# EAGLE board sanguish long no fil2 (EAGLE 6.2)
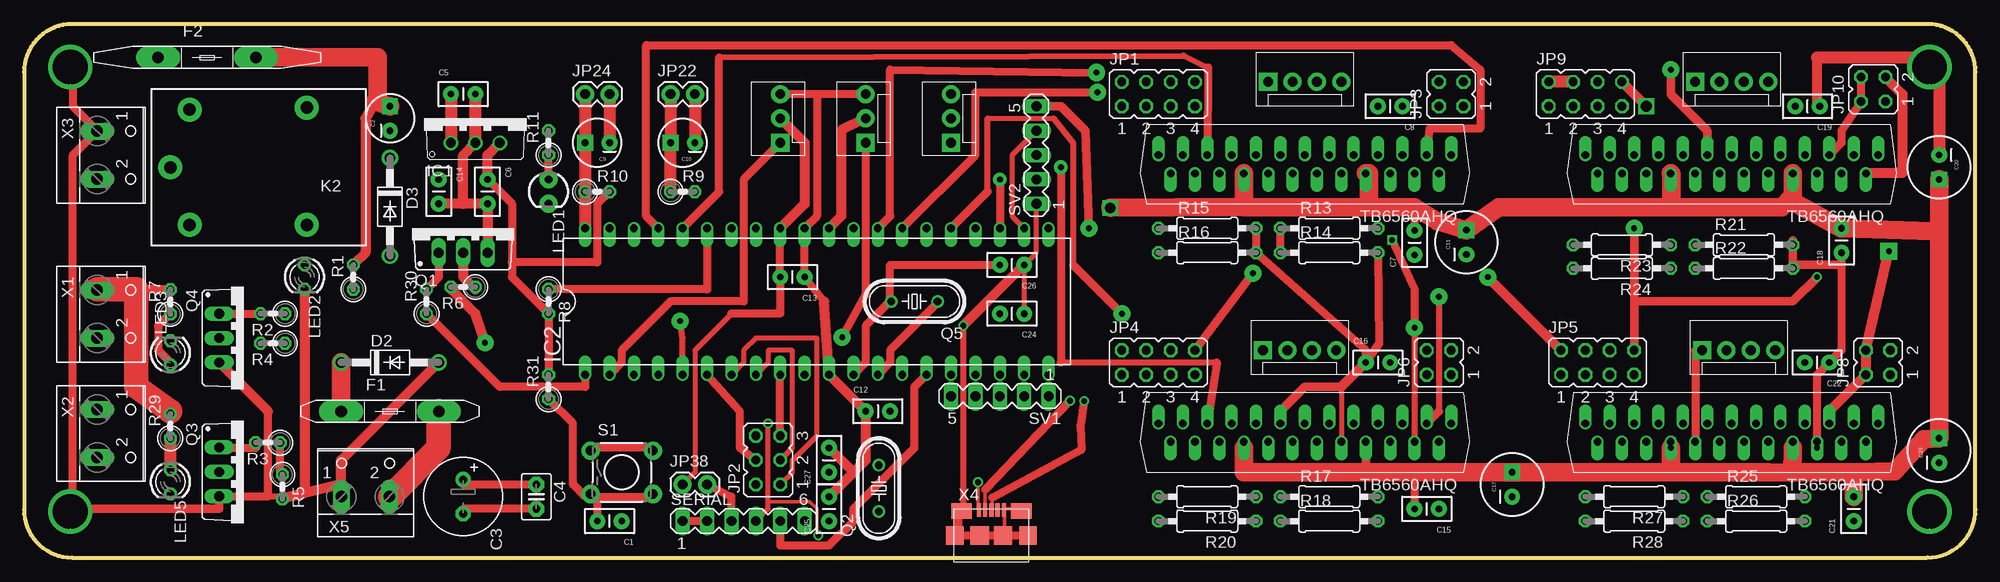
[diagram p0: board, top side]
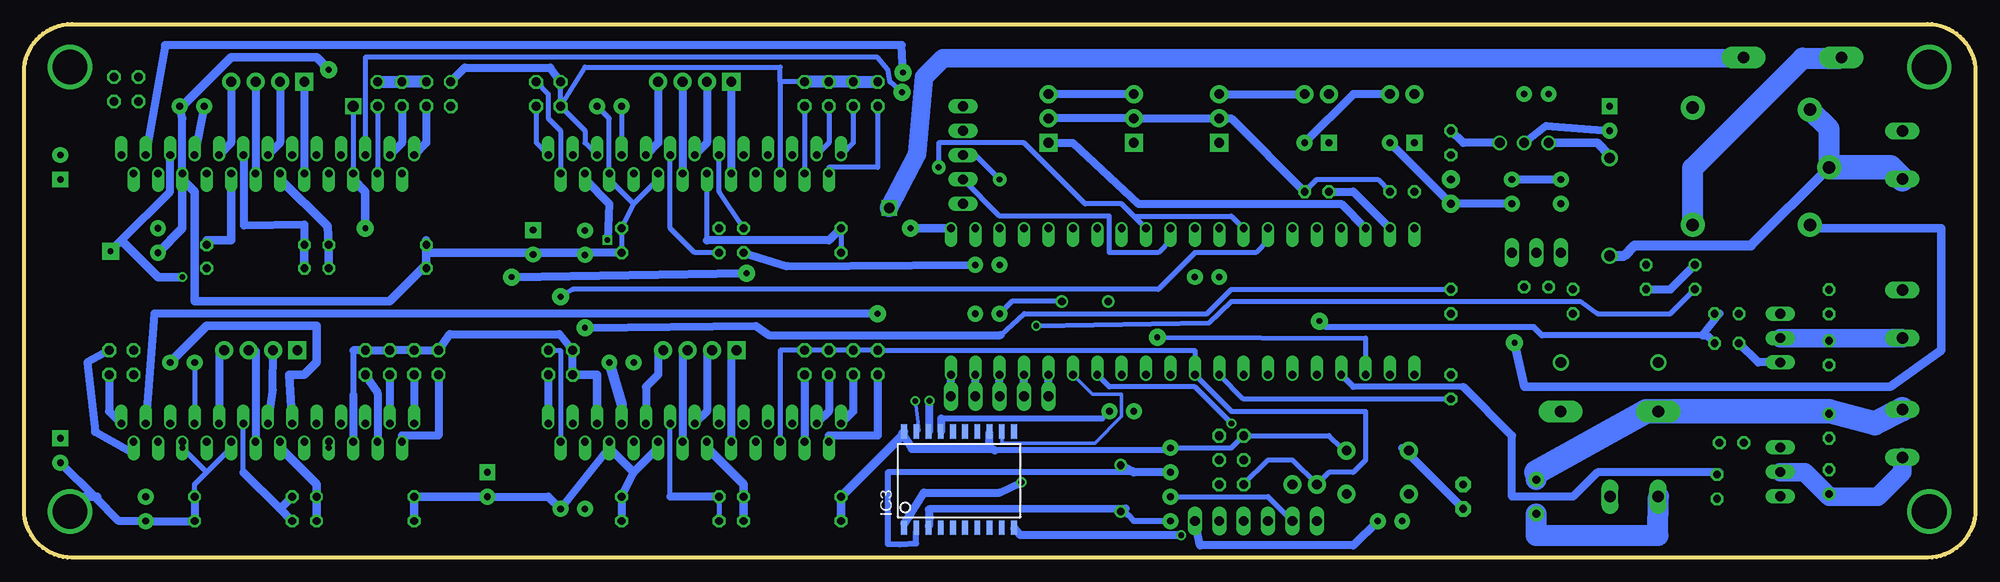
[diagram p1: board, bottom side, seen from below]

Size 203.18 x 55.55 mm. Coordinates in mm from the lower left corner, seen from the top.
Outline: 0,50.55 0,5 arc90 5,0 198.18,0 arc90 203.18,5 203.18,50.55 arc90 198.18,55.55 5,55.55 arc90 0,50.55
Copper layers (1*16): Top 0.035mm / dielectric 1.5mm / Bottom 0.035mm
Design rules: minimum track width 35mil, minimum drill 24mil, track to track 8mil, track to pad 8mil, pad to pad 8mil, via to via 8mil, smd to smd 8mil, copper to edge 40mil, drill to drill 8mil, minimum pad ring 10mil, minimum via ring 8mil, stop-mask expansion 4mil, vias tented up to drill 0mil, thermal gap 10mil
Net classes: 0 default: width 0.178 mm, drill 0.406 mm, clearance 0.178 mm; 1 Power: width 0.3 mm, drill 0.406 mm, clearance 0.178 mm

## Footprints (pad centres in the part's own frame; a part is rotated, then mirrored left to right if it is on the bottom)
CAP-PTH-SMALL2 = drill 0.7 pad 1.651: 1 0,0; 2 2.54,0
CPOL-RADIAL-10UF-25V = drill 0.7 pad 1.651 square: 1 1.27,0 | drill 0.7 pad 1.651: 2 -1.27,0
E3,5-8 = drill 0.813 pad 1.6: + -1.778,0 | drill 0.813 pad 1.6 octagon: - 1.778,0
C2.5-3 = drill 0.813 pad 1.6 octagon: 1 -1.27,0; 2 1.27,0
CPOL-RADIAL-100UF-25V = drill 0.7 pad 1.651 square: 1 1.27,0 | drill 0.7 pad 1.651: 2 -1.27,0
DO41-10 = drill 1.118: A 5.08,0; C -5.08,0
MFR500 = drill 1.2 pad 2.3 long: 1 -5.08,0; 2 5.08,0
MFR1100 = drill 1.2 pad 2.3 long: 1 -5.08,0; 2 5.08,0
78XXL-CUSTOM = drill 1.016: GND 0,0; IN -2.54,0; OUT 2.54,0
DIL40 = drill 0.813 offset: 1 -24.13,-7.62; 2 -21.59,-7.62; 3 -19.05,-7.62; 4 -16.51,-7.62; 5 -13.97,-7.62; 6 -11.43,-7.62; 7 -8.89,-7.62; 8 -6.35,-7.62; 9 -3.81,-7.62; 10 -1.27,-7.62; 11 1.27,-7.62; 12 3.81,-7.62; 13 6.35,-7.62; 14 8.89,-7.62; 15 11.43,-7.62; 16 13.97,-7.62; 17 16.51,-7.62; 18 19.05,-7.62; 19 21.59,-7.62; 20 24.13,-7.62; 21 24.13,7.62; 22 21.59,7.62; 23 19.05,7.62; 24 16.51,7.62; 25 13.97,7.62; 26 11.43,7.62; 27 8.89,7.62; 28 6.35,7.62; 29 3.81,7.62; 30 1.27,7.62; 31 -1.27,7.62; 32 -3.81,7.62; 33 -6.35,7.62; 34 -8.89,7.62; 35 -11.43,7.62; 36 -13.97,7.62; 37 -16.51,7.62; 38 -19.05,7.62; 39 -21.59,7.62; 40 -24.13,7.62
SOIC20 = smd 0.6 x 1.5: 1 -5.715,-5; 2 -4.445,-5; 3 -3.175,-5; 4 -1.905,-5; 5 -0.635,-5; 6 0.635,-5; 7 1.905,-5; 8 3.175,-5; 9 4.445,-5; 10 5.715,-5; 11 5.715,5; 12 4.445,5; 13 3.175,5; 14 1.905,5; 15 0.635,5; 16 -0.635,5; 17 -1.905,5; 18 -3.175,5; 19 -4.445,5; 20 -5.715,5
JP4Q = drill 0.914 octagon: 1 -3.81,-1.27; 2 -3.81,1.27; 3 -1.27,-1.27; 4 -1.27,1.27; 5 1.27,-1.27; 6 1.27,1.27; 7 3.81,-1.27; 8 3.81,1.27
JP3Q = drill 0.914 octagon: 1 -2.54,-1.27; 2 -2.54,1.27; 3 0,-1.27; 4 0,1.27; 5 2.54,-1.27; 6 2.54,1.27
JP2Q = drill 0.914 octagon: 1 -1.27,-1.27; 2 -1.27,1.27; 3 1.27,-1.27; 4 1.27,1.27
MOLEX-1X4 = drill 1.016 pad 1.88 square: 1 0,0 | drill 1.016 pad 1.88: 2 2.54,0; 3 5.08,0; 4 7.62,0
1X02 = drill 1.016 pad 1.88: 1 0,0; 2 2.54,0
MOLEX-1X3 = drill 1.016 pad 1.88 square: 1 0,0 | drill 1.016 pad 1.88: 2 2.54,0; 3 5.08,0
ZN5 = drill 1.3 pad 2.5: 11 8.89,0; 12 -5.31,-6.2; 14 -5.31,6; A1 6.89,6; A2 6.89,-6
LED3MM = drill 0.813 pad 1.88: A -1.27,0; K 1.27,0
LED3MM' = drill 0.813 octagon: A -1.27,0; K 1.27,0
TO220BV = drill 1.016 long: D 0,-2.54; G -2.54,-2.54; S 2.54,-2.54
HC49/S = drill 0.813: 1 -2.413,0; 2 2.413,0
0207/2V = drill 0.813 octagon: 1 -1.27,0; 2 1.27,0
0207/10 = drill 0.813 octagon: 1 -5.08,0; 2 5.08,0
TACTILE-PTH = drill 1.016 pad 1.88: 1 -3.251,2.261; 2 3.251,2.261; 3 -3.251,-2.261; 4 3.251,-2.261
MA06-1 = drill 1.016 long: 1 -6.35,0; 2 -3.81,0; 3 -1.27,0; 4 1.27,0; 5 3.81,0; 6 6.35,0
MA05-1 = drill 1.016 long: 1 -5.08,0; 2 -2.54,0; 3 0,0; 4 2.54,0; 5 5.08,0
PLATEDSCREW = drill 3.6: GND 0,0
ZIP25 = drill 0.8 pad 1.27 offset: 1 -15.24,0; 2 -13.97,1.905; 3 -12.7,0; 4 -11.43,1.905; 5 -10.16,0; 6 -8.89,1.905; 7 -7.62,0; 8 -6.35,1.905; 9 -5.08,0; 10 -3.81,1.905; 11 -2.54,0; 12 -1.27,1.905; 13 0,0; 14 1.27,1.905; 15 2.54,0; 16 3.81,1.905; 17 5.08,0; 18 6.35,1.905; 19 7.62,0; 20 8.89,1.905; 21 10.16,0; 22 11.43,1.905; 23 12.7,0; 24 13.97,1.905; 25 15.24,0
W237-102 = drill 1.194 long: 1 -2.5,-1.27; 2 2.5,-1.27
10118192-0001LF = smd 0.4 x 1.4: 1 -1.3,2.675; 2 -0.65,2.675; 3 0,2.675; 4 0.65,2.675; 5 1.3,2.675 | smd 1.8 x 1.9: M1 3.8,0; M2 -3.8,0 | smd 2.1 x 1.6: M3 -3.1,2.55; M4 3.1,2.55 | smd 1.9 x 1.9: M5 1.2,0; M6 -1.2,0

## Placement (x,y rotation side)
C1  0.1uF  [CAP-PTH-SMALL2]  62.23,3.81 180 top
C2  100uF  [CPOL-RADIAL-10UF-25V]  38.1,45.72 90 top
C3  470uF  [E3,5-8]  45.72,6.35 270 top
C4  100nF  [C2.5-3]  53.34,6.35 270 top
C5  0.33uF  [CAP-PTH-SMALL2]  44.45,48.26 0 top
C6  0.1uF  [CAP-PTH-SMALL2]  48.26,39.37 270 top
C7  0.1uF  [CAP-PTH-SMALL2]  144.78,31.52 90 top
C8  0.1uF  [CAP-PTH-SMALL2]  143.51,46.99 180 top
C9  10uF  [CPOL-RADIAL-10UF-25V]  59.69,43.18 180 top
C10  10uF  [CPOL-RADIAL-10UF-25V]  68.58,43.18 180 top
C11  10uf  [CPOL-RADIAL-100UF-25V]  150.17,32.83 90 top
C12  0.1uF  [CAP-PTH-SMALL2]  87.63,15.24 0 top
C13  0.1uF  [CAP-PTH-SMALL2]  81.28,29.21 180 top
C14  0.1uF  [CAP-PTH-SMALL2]  43.18,39.37 270 top
C15  0.1uF  [CAP-PTH-SMALL2]  147.32,5.08 180 top
C16  0.1uF  [CAP-PTH-SMALL2]  139.7,20.32 0 top
C17  10uf  [CPOL-RADIAL-100UF-25V]  154.94,7.62 90 top
C18  0.1uF  [CAP-PTH-SMALL2]  189.23,31.75 90 top
C19  0.1uF  [CAP-PTH-SMALL2]  186.96,46.99 180 top
C20  10uf  [CPOL-RADIAL-100UF-25V]  199.39,40.64 270 top
C21  0.1uF  [CAP-PTH-SMALL2]  190.5,3.81 90 top
C22  0.1uF  [CAP-PTH-SMALL2]  187.96,20.32 180 top
C23  10uf  [CPOL-RADIAL-100UF-25V]  199.39,11.16 90 top
C24  22pf  [CAP-PTH-SMALL2]  104.14,25.4 180 top
C25  22pf  [CAP-PTH-SMALL2]  83.82,3.81 90 top
C26  22pf  [CAP-PTH-SMALL2]  104.14,30.48 180 top
C27  22pf  [CAP-PTH-SMALL2]  83.82,8.89 90 top
D2  1N4004  [DO41-10]  38.1,20.32 0 top
D3  1N4004  [DO41-10]  38.1,36.52 270 top
F1  MFR500  [MFR500]  38.1,15.24 0 top
F2  MFR1100  [MFR1100]  19.05,52.07 0 top
IC1  LM7805  [78XXL-CUSTOM]  46.99,43.18 0 top
IC2  ATMEGA644-20PU  [DIL40]  82.55,26.67 0 top
IC3  MCP2200SOIC20  [SOIC20]  105.83,8.12 0 bottom
JP1  [JP4Q]  118.11,48.26 0 top
JP2  [JP3Q]  77.47,10.16 90 top
JP3  [JP2Q]  148.59,48.26 90 top
JP4  [JP4Q]  118.11,20.32 0 top
JP5  [JP4Q]  163.83,20.32 0 top
JP6  [JP2Q]  147.32,20.32 90 top
JP7  MOT-E  [MOLEX-1X4]  129.54,49.53 0 top
JP8  [JP2Q]  193.04,20.32 90 top
JP9  [JP4Q]  162.56,48.26 0 top
JP10  [JP2Q]  192.54,48.76 90 top
JP22  E-THERM  [1X02]  67.31,48.26 0 top
JP24  B-THERM  [1X02]  58.42,48.26 0 top
JP25  MOT-E  [MOLEX-1X4]  129,21.59 0 top
JP26  MOT-E  [MOLEX-1X4]  173.99,49.53 0 top
JP27  X-STOP  [MOLEX-1X3]  87.63,43.18 90 top
JP28  Y-STOP  [MOLEX-1X3]  96.52,43.18 90 top
JP29  Z-STOP  [MOLEX-1X3]  78.74,43.18 90 top
JP31  MOT-E  [MOLEX-1X4]  174.72,21.59 0 top
JP38  X-MS2  [1X02]  68.58,7.62 0 top
K2  ZNS5124  [ZN5]  24.13,40.64 180 top
LED1  POWER  [LED3MM]  54.61,38.1 270 top
LED2  [LED3MM']  29.21,29.21 270 top
LED3  [LED3MM']  15.24,21.32 90 top
LED5  [LED3MM']  15.24,7.89 270 top
Q1  STP55NF06L  [TO220BV]  45.72,34.29 0 top
Q2  [HC49/S]  89,7.22 90 top
Q3  STP55NF06L  [TO220BV]  22.86,8.93 270 top
Q4  STP55NF06L  [TO220BV]  22.86,22.86 270 top
Q5  [HC49/S]  92.71,26.67 180 top
R1  1k  [0207/2V]  34.29,29.21 90 top
R2  10r  [0207/2V]  25.9,25.4 180 top
R3  10r  [0207/2V]  25.4,11.97 180 top
R4  100k  [0207/2V]  25.9,22.32 180 top
R5  100k  [0207/2V]  26.9,7.39 270 top
R6  560r  [0207/2V]  45.72,28.17 180 top
R7  1.8k  [0207/2V]  15.24,26.63 90 top
R8  100k  [0207/2V]  54.61,26.67 270 top
R9  4.7k  [0207/2V]  68.58,38.1 0 top
R10  4.7k  [0207/2V]  59.69,38.1 0 top
R11  1k  [0207/2V]  54.61,43.18 90 top
R13  0.5 ohm  [0207/10]  135.89,34.29 0 top
R14  0.5 ohm  [0207/10]  135.89,31.75 0 top
R15  0.5 ohm  [0207/10]  123.19,34.29 0 top
R16  0.5 ohm  [0207/10]  123.19,31.75 0 top
R17  0.5 ohm  [0207/10]  135.89,6.35 0 top
R18  0.5 ohm  [0207/10]  135.89,3.81 0 top
R19  0.5 ohm  [0207/10]  123.19,6.35 180 top
R20  0.5 ohm  [0207/10]  123.19,3.81 180 top
R21  0.5 ohm  [0207/10]  179.07,32.56 0 top
R22  0.5 ohm  [0207/10]  179.07,30.12 0 top
R23  0.5 ohm  [0207/10]  166.37,32.56 180 top
R24  0.5 ohm  [0207/10]  166.37,30.12 180 top
R25  0.5 ohm  [0207/10]  180.34,6.35 0 top
R26  0.5 ohm  [0207/10]  180.34,3.81 0 top
R27  0.5 ohm  [0207/10]  167.64,6.35 180 top
R28  0.5 ohm  [0207/10]  167.64,3.81 180 top
R29  1.8k  [0207/2V]  15.24,13.7 90 top
R30  560r  [0207/2V]  41.91,26.67 90 top
R31  100k  [0207/2V]  54.61,17.78 90 top
S1  RESET  [TACTILE-PTH]  62.23,8.89 0 top
SERIAL  [MA06-1]  74.93,3.81 0 top
SV1  [MA05-1]  101.6,16.81 180 top
SV2  [MA05-1]  105.41,41.91 90 top
U$7  PLATED-SCREW  [PLATEDSCREW]  198.39,4.81 0 top
U$17  PLATED-SCREW  [PLATEDSCREW]  4.81,51.07 0 top
U$21  TB6560  [ZIP25]  133.35,13.97 180 top
U$37  PLATED-SCREW  [PLATEDSCREW]  4.81,4.81 0 top
U$38  PLATED-SCREW  [PLATEDSCREW]  198.39,51.07 0 top
U$43  TB6560  [ZIP25]  177.8,41.91 180 top
U$46  TB6560  [ZIP25]  177.8,13.97 180 top
X1  [W237-102]  8.89,25.36 270 top
X2  [W237-102]  8.89,12.93 270 top
X3  [W237-102]  8.89,41.91 270 top
X4  MICRO-USB-SHIELD-  [10118192-0001LF]  100.72,2.31 0 top
X5  [W237-102]  35.56,7.62 0 top
XMOT  TB6560  [ZIP25]  133.35,41.91 180 top

## Library data of the parts
C1 C2 C5-C27 IC1 JP7 JP22 JP24-JP29 JP31 JP38 LED1 S1 = SparkFun
C3 = adafruit
C4 = capacitor-wima
D2 D3 = diode
F1 F2 = RepRapjr
IC2 = atmel; MPN: ATMEGA644-20PU; OC_FARNELL: 1288340; OC_NEWARK: 23M5060
IC3 = microchip-update-2
JP1-JP6 JP8-JP10 = jumper
K2 = relay; OC_FARNELL: unknown; OC_NEWARK: unknown
LED2 LED3 LED5 = led
Q1 Q3 Q4 = transistor-power
Q2 Q5 = crystal; OC_FARNELL: 1667008; OC_NEWARK: unknown
R1-R11 R13-R31 = resistor
SERIAL SV1 SV2 = con-lstb; OC_FARNELL: unknown; OC_NEWARK: unknown
U$7 U$17 U$37 U$38 = Sanguinololu
U$21 U$43 U$46 XMOT = tb6560
X1-X3 X5 = con-wago-500; MPN: 237-102; OC_FARNELL: unknown; OC_NEWARK: 70K9898
X4 = shinythings

## Nets
5V: C6.1 C13.2 C14.1 IC1.OUT IC2.10 IC2.30 IC2.32 JP1.2 JP1.4 JP1.6 JP1.8 JP2.2 JP3.2 JP3.4 JP4.2 JP4.4 JP4.6 JP4.8 JP5.2 JP5.4 JP5.6 JP5.8 JP6.2 JP6.4 JP8.2 JP8.4 JP9.2 JP9.4 JP9.6 JP9.8 JP10.2 JP10.4 JP27.2 JP28.2 JP29.2 JP38.1 R8.2 R9.2 R10.2 R11.2 R31.2 SV2.2 U$21.5 U$21.20 U$43.5 U$43.20 U$46.5 U$46.20 XMOT.5 XMOT.20
!HOTBED: IC2.5 R2.1 R4.1
!HOTEND: IC2.4 R3.1 R5.1
!RESET: C1.2 IC2.9 JP2.5 R31.1 S1.3 S1.4
!STEP-ENABLE-E: U$46.4
!STEP-ENABLE-XY: IC2.35 R8.1 U$21.4 XMOT.4
+12V: C3.+ C4.1 D2.C F1.1 R7.2 R29.2 X1.1 X2.1
B-THERM: C9.1 IC2.40 JP24.1 R10.1
E-DIR: U$46.21
E-STEP: IC2.25 U$46.3
E-THERM: C10.1 IC2.39 JP22.1 R9.1
GND [Power]: C2.2 C3.- C4.2 C5.2 C6.2 C7.1 C8.1 C9.2 C10.2 C11.2 C12.1 C13.1 C14.2 C15.1 C16.1 C17.2 C18.1 C19.1 C20.2 C21.1 C22.1 C23.2 C24.1 C25.2 C26.1 C27.2 D2.A IC1.GND IC2.11 IC2.31 IC3.13 IC3.20 JP2.6 JP22.2 JP24.2 JP27.3 JP28.3 JP29.3 LED1.K LED2.K Q1.S Q3.S Q4.S R4.2 R5.2 R13.2 R14.2 R15.2 R16.2 R17.2 R18.2 R19.2 R20.2 R21.2 R22.2 R23.2 R24.2 R25.2 R26.2 R27.2 R28.2 S1.1 S1.2 SERIAL.1 SERIAL.2 SV2.1 U$7.GND U$17.GND U$21.6 U$21.10 U$21.15 U$37.GND U$38.GND U$43.6 U$43.10 U$43.15 U$46.6 U$46.10 U$46.15 X3.1 X4.5 X4.M1 X4.M2 X4.M3 X4.M4 X4.M5 X4.M6 X5.1 XMOT.6 XMOT.10 XMOT.15
LED1: LED1.A R11.1
N$1: JP7.1 XMOT.16
N$2: JP25.1 U$21.16
N$3: JP7.2 XMOT.13
N$4: JP7.3 XMOT.12
N$5: JP7.4 XMOT.9
N$6: JP5.7 U$46.22
N$7: JP1.7 XMOT.22
N$8: JP1.3 XMOT.25
N$9: JP1.1 XMOT.24
N$10: JP10.3 U$43.2
N$11: JP3.1 XMOT.1
N$12: JP5.5 U$46.23
N$13: JP25.2 U$21.13
N$14: JP25.3 U$21.12
N$15: R13.1 R14.1 XMOT.11
N$16: R15.1 R16.1 XMOT.14
N$17: JP25.4 U$21.9
N$18: JP9.7 U$43.22
N$19: C8.2 XMOT.7
N$20: JP4.7 U$21.22
N$21: JP4.3 U$21.25
N$22: JP4.1 U$21.24
N$23: JP9.5 U$43.23
N$24: JP8.3 U$46.2
N$25: JP5.3 U$46.25
N$26: R17.1 R18.1 U$21.11
N$27: R19.1 R20.1 U$21.14
N$28: C16.2 U$21.7
N$29: JP26.1 U$43.16
N$30: JP26.2 U$43.13
N$31: JP26.3 U$43.12
N$32: JP26.4 U$43.9
N$33: JP5.1 U$46.24
N$34: JP6.3 U$21.2
N$35: JP8.1 U$46.1
N$36: JP3.3 XMOT.2
N$37: JP4.5 U$21.23
N$38: JP1.5 XMOT.23
N$39: JP9.3 U$43.25
N$40: R21.1 R22.1 U$43.11
N$41: R23.1 R24.1 U$43.14
N$42: C19.2 U$43.7
N$43: JP31.1 U$46.16
N$44: JP31.2 U$46.13
N$45: JP31.3 U$46.12
N$46: JP31.4 U$46.9
N$47: JP9.1
N$48: LED2.A R1.1
N$49: JP10.1
N$50: IC2.16 SV1.5
N$51: IC2.17 SV1.4
N$52: IC2.18 SV1.3
N$53: IC2.19 SV1.2
N$54: R25.1 R26.1 U$46.11
N$55: R27.1 R28.1 U$46.14
N$56: C22.2 U$46.7
N$57: LED3.K Q4.D X1.2
N$58: IC2.20 SV1.1
N$59: LED5.K Q3.D X2.2
N$60: Q4.G R2.2
N$61: Q3.G R3.2
N$62: IC2.21 SV2.5
N$63: IC2.22 SV2.4
N$64: LED3.A R7.1
N$65: LED5.A R29.1
N$66: Q1.D R6.1
N$67: Q1.G R30.2
N$68: C5.1 D3.C IC1.IN
N$69: IC2.23 SV2.3
N$70: C1.1 SERIAL.6
N$71: JP38.2 SERIAL.3
N$72: F2.1 K2.14
N$73: K2.A1 R6.2
N$74: F1.2 X5.2
N$75: C12.2 IC3.17
N$76: JP6.1 U$21.1
N$77: IC3.1 X4.1
N$78: IC3.18 X4.2
N$79: IC3.19 X4.3
N$80: C26.2 IC2.12 Q5.2
N$81: C24.2 IC2.13 Q5.1
N$82: C27.1 IC3.2 Q2.2
N$83: C25.1 IC3.3 Q2.1
PB5-MOSI: IC2.6 JP2.4
PB6-MISO: IC2.7 JP2.1
PB7-SCK: IC2.8 JP2.3
RELAY: IC2.1 R30.1
RELAY_POWER: D3.A K2.11 K2.A2 X3.2
RXD: IC2.14 IC3.10 SERIAL.4
TXD: IC2.15 IC3.12 SERIAL.5
VMOT: C2.1 C7.2 C11.1 C15.2 C17.1 C18.2 C20.1 C21.2 C23.1 F2.2 R1.2 U$21.8 U$21.18 U$43.8 U$43.18 U$46.8 U$46.18 XMOT.8 XMOT.18
X-DIR: IC2.36 XMOT.21
X-STEP: IC2.37 XMOT.3
X-STOP: IC2.3 JP27.1
Y-DIR: IC2.29 IC2.33 U$21.21
Y-STEP: IC2.34 U$21.3
Y-STOP: IC2.38 JP28.1
Z-DIR: IC2.27 U$43.21
Z-ENABLE: U$43.4
Z-STEP: IC2.28 U$43.3
Z-STOP: IC2.2 JP29.1

## Tracks (layer width: path | path; a pad name or v marks a point on that pad's centre or on a via)
5V  (via drill 0.6 pad 1.78, 0.61, 1.1)
  Top 0.508: JP38.1 69.85,8.89 69.85,21.59 73.66,25.4 | U$46.5 187.96,15.24
  Top 0.813: R31.2 R8.2 50.8,29.21 50.8,30.75 | 50.8,30.75 50.8,36.83 C6.1 | IC2.32 C13.2 78.74,25.4 73.66,25.4 | 50.8,30.75 59.69,30.75 59.69,36.83 R10.2 | U$43.5 189.23,43.18 189.23,44.45 JP10.2 JP10.4
  Top 0.889: v167.64,34.29 167.64,26.67 | 167.64,26.67 JP5.8 | JP4.8 v127.94,29.61 | v186.69,29.21 184.15,26.67 167.64,26.67
  Top 1.016: IC1.OUT 48.26,41.91 C6.1 | IC2.30 85.09,35.56 85.09,44.48 JP27.2 | IC2.32 81.28,36.83 81.28,43.18 JP29.2 | JP9.8 v168.91,46.99 | 187.96,15.24 JP8.2 JP8.4 v194.17,31.89 | v152.4,29.21 JP5.2
  Top 1.27: JP9.4 JP9.2
  Bottom 0.508: JP2.2 73.66,10.16 71.12,10.16 JP38.1 67.31,8.89 64.77,8.89 63.5,10.16 63.5,15.24 77.47,15.24 IC2.10 81.28,21.59 JP4.2 JP4.4 JP4.6 JP4.8 124.46,21.59 U$21.20 | R10.2 62.23,39.37 68.58,39.37 R9.2 | XMOT.5 144.78,43.18 144.78,44.45 JP3.2 | JP3.2 144.78,51.05 124.46,51.05 124.46,49.53 | JP3.2 JP3.4 | v168.91,46.99 U$43.20 | SV2.2 101.6,35.56 90.17,35.56 90.17,31.75 85.09,31.75 83.82,33.02 IC2.30 | 124.46,49.53 XMOT.20 | JP1.8 124.46,49.53
  Bottom 0.61: 168.91,21.59 168.91,16.91
  Bottom 0.813: R11.2 53.34,43.18 IC1.OUT | C6.1 C14.1 | R9.2 77.47,45.72 JP29.2 JP27.2 JP28.2 | JP3.4 148.39,51 157.28,51 JP9.2 | JP6.2 JP6.4 147.42,23.26 158.85,23.26 JP5.2 JP5.4 JP5.6 JP5.8 168.91,21.59 | 168.91,16.91 U$46.20 | U$43.5 187.96,38.1 193.04,33.02 v194.17,31.89
  Bottom 0.889: U$21.5 143.51,19.05 JP6.2 | v167.64,34.29 167.64,38.1 168.91,39.37 U$43.20 | v127.94,29.61 v152.4,29.21 | 193.04,33.02 189.23,29.21 v186.69,29.21
  Bottom 1.27: JP1.2 JP1.4 JP1.6 JP1.8 | JP9.4 JP9.6 JP9.8
!HOTBED  (via drill 0.61 pad 1.78)
  Top 0.635: v68.31,24.63 68.58,22.86 IC2.5
  Bottom 0.61: 28.44,23.13 45.13,23.13 46,24 67.68,24 v68.31,24.63
  Bottom 0.635: 26.67,25.4 R2.1
  Bottom 0.813: 26.67,25.4 28.44,23.13 27.94,23.09 R4.1
!HOTEND
  Top 0.635: 26.67,8.89 R5.1
  Top 0.813: 26.67,8.89 R3.1
  Bottom 0.635: IC2.4 64.77,17.78 53.34,17.78 | 26.67,8.89 R5.1
  Bottom 0.813: 53.34,17.78 48.26,12.7 48.26,6.35 41.91,6.35 39.37,8.89 26.67,8.89
!RESET
  Top 0.508: 59.69,6.35 S1.3
  Top 0.813: JP2.5 IC2.9 | R31.1 57.15,13.97 57.15,7.62 58.42,6.35 S1.3 | C1.2 59.69,6.35 64.77,6.35 S1.4
  Bottom 0.508: IC2.9 76.2,16.51 R31.1
!STEP-ENABLE-XY  (via drill 0.6, 0.61 pad 1.78)
  Top 0.61: v144.78,23.93 U$21.4
  Top 0.813: R8.1 71.12,27.94 IC2.35 | v144.78,23.93 144.78,27.94 v142.44,33.08
  Bottom 0.508: 144.78,39.37 XMOT.4 | R8.1 77.47,27.94 80.01,25.4 99.06,25.4 101.5,23.16
  Bottom 0.813: v142.44,33.08 142.24,36.83 144.78,39.37 | 101.5,23.16 125.63,23.16 127,24.13 v144.78,23.93
+12V
  Top 0.635: 7.62,27.94 X1.1 | 15.24,27.94 R7.2 | 15.24,15.24 R29.2
  Top 0.813: C4.1 45.72,7.62 C3.+ | 15.24,27.94 11.7,27.94
  Top 1.93: F1.1 D2.C
  Top 2.54: 7.62,27.94 11.7,27.94 11.7,17.78 15.24,15.24
  Bottom 0.635: 15.24,15.24 R29.2
  Bottom 1.93: 7.62,15.47 X2.1
  Bottom 2.184: 45.72,8.89 C3.+
  Bottom 2.54: 45.72,8.89 34.29,15.24 F1.1 15.24,15.24 10.47,13.97 7.62,15.47
B-THERM
  Top 1.27: IC2.40 R10.1 C9.1 JP24.1
E-STEP  (via drill 0.61 pad 1.78)
  Top 0.508: 100.33,45.72 107.18,45.72
  Top 0.61: 109.22,30.48 109.22,43.18 107.18,45.72 | 100.33,38.1 100.33,45.72
  Top 0.813: 109.22,30.48 v114.3,25.4 | IC2.25 100.33,38.1
  Bottom 0.813: U$46.3 189.6,25.4 v114.3,25.4
E-THERM
  Top 1.27: JP22.1 C10.1 R9.1
  Bottom 0.813: IC2.39 64.77,38.1 R9.1
GND  (via drill 0.6, 0.6 pad 1.78, 0.61)
  Top 0.381: 97.29,4.83 X4.M3 97.79,5.08 | 97.29,2.54 X4.M2 | X4.M4 103.63,5.08 102.11,5.08 X4.5 102.11,4.83 102.11,2.54 X4.M5
  Top 0.508: 33.02,6.35 X5.1 33.02,7.62 | 59.69,11.43 S1.1 | 64.77,11.43 S1.2 | C24.1 C26.1 105.41,31.75 SV2.1 | v186.69,11.43 U$46.6 | 137.16,17.78 U$21.10
  Top 0.61: v97.79,24.13 97.79,5.08
  Top 0.635: 26.67,6.35 25.4,6.35 | 29.21,6.89 26.67,6.35 | 26.67,6.35 R5.2
  Top 0.813: C4.2 45.72,5.08 C3.- | 64.77,11.43 59.69,11.43 | SERIAL.2 SERIAL.1 | 83.32,26.67 C13.1 IC2.31 82.55,35.56 82.55,48.26 | JP27.3 82.55,48.26 | 82.55,48.26 JP29.3 | X4.M2 X4.M6 X4.M5 X4.M1 | R15.2 R16.2 139.7,21.59 C16.1 141.07,22.29 R14.2 | U$46.6 186.69,19.05 C22.1 189.23,21.59 189.23,30.48 C18.1 | 97.29,2.54 97.29,4.83 | 20.32,6.35 25.4,6.35 25.4,15.24 | 5.08,50.8 5.08,46.99 7.62,44.45 5.08,41.91 5.08,5.08
  Top 0.889: 5.08,50.8 U$17.GND | Q3.S 20.32,6.35 20.32,5.08 5.08,5.08 U$37.GND | 7.62,44.45 X3.1 | 186.69,46.99 C19.1 | U$21.15 130.81,15.24 133.35,17.78 137.16,17.78 | U$43.15 175.26,44.45 171.45,48.26 v171.45,50.8 | 184.15,30.48 R21.2 184.15,33.02 | 189.23,30.48 184.15,30.48 | 184.15,30.48 R22.2 | 144.78,31.75 C7.1
  Top 1.016: D2.A 33.02,10.16 33.02,7.62 | 33.02,6.35 33.02,7.62 | 33.02,7.62 R5.2 | 86.36,8.89 87.63,10.16 C12.1 IC2.11 83.32,26.67 | 86.36,8.89 C25.2 | 86.36,8.89 C27.2 | Q1.S C6.2 45.72,36.83 | 45.72,36.83 C14.2 | IC1.GND 45.72,41.91 45.72,36.83 | C26.1 v97.79,24.13 | C16.1 137.16,17.78 | 25.4,15.24 Q4.S | LED2.K 29.21,6.89 | 186.69,46.99 186.69,52.07
  Top 1.27: JP22.2 C10.2 | C5.2 IC1.GND | JP24.2 C9.2 | C20.2 199.39,50.8 U$38.GND 198.12,52.07 186.69,52.07
  Bottom 0.381: 102.67,12.95 IC3.13 | 111.76,12.95 IC3.20 | C27.2 84.07,11.18
  Bottom 0.508: 59.69,11.43 S1.1 | C27.2 77.47,11.43 JP2.6 67.31,12.7 66.04,11.43 S1.2 | SERIAL.2 73.66,6.35 C25.2 | 33.02,6.35 X5.1 | XMOT.15 130.81,38.1 R15.2 | 139.7,36.83 R13.2 R14.2 | 139.7,36.83 137.16,39.37 XMOT.10 | 139.7,36.83 142.24,39.37 XMOT.6 142.24,45.72 C8.1 | 137.16,11.43 U$21.10 | 142.24,11.43 U$21.6 | LED2.K 31.75,25.4 39.37,25.4 41.14,26.67 77.47,26.67 79.81,24.43 v97.79,24.13 | 184.15,8.89 185.42,7.62 R25.2 | 184.15,8.89 181.61,11.43 U$46.10 | v186.69,11.43 184.15,8.89 | 144.78,31.75 C7.1
  Bottom 0.61: 84.07,11.18 102.11,11.18
  Bottom 0.813: 59.69,11.43 C4.2 | JP27.3 JP28.3 | JP29.3 JP22.2 | C2.2 44.72,44.95 IC1.GND | C6.2 LED1.K C9.2 | C10.2 64.77,48.26 JP24.2 | C26.1 123.71,30.35 R16.2 | 139.7,8.89 R17.2 R18.2 | 139.7,8.89 137.16,11.43 | 139.7,8.89 142.24,11.43 C15.1 148.59,6.35 C17.2 | C19.1 186.69,45.72 U$43.6 | R25.2 R26.2 C21.1 193.31,3.81 195.72,6.21 C23.2 | R14.2 144.78,31.75 | 102.67,11.34 102.67,12.95 | 102.67,11.34 110.74,11.34 111.76,12.95 | 102.11,11.18 102.67,11.34 | Q4.S 22.63,20.32 R4.2 | 196.85,6.35 U$7.GND
  Bottom 0.889: 196.85,6.35 195.58,6.35 195.72,6.21 | U$46.15 175.56,19.05 173.99,19.05 172.72,20.32 172.72,24.13 184.15,24.13 C22.1 | R28.2 R27.2 C17.2 | R20.2 R19.2 111.76,12.7 IC3.20 | v171.45,50.8 172.72,52.07 181.61,52.07 186.69,46.99 C19.1 | U$43.10 181.61,33.02 184.15,33.02 R21.2 | C18.1 186.69,34.29 186.69,39.37 | 161.29,31.75 R23.2 161.29,33.02 | 161.29,31.75 R24.2 161.29,30.48 165.1,26.67 185.42,26.67 185.42,38.1 186.69,39.37 | 144.78,31.75 149.86,31.75 | 149.86,31.75 161.29,31.75 | 149.86,31.75 C11.2 | 186.69,39.37 U$43.6
  Bottom 2.184: 33.02,6.35 33.06,2.31 45.72,2.31 C3.-
LED1
  Top 0.813: LED1.A R11.1
N$1
  Bottom 0.813: JP7.1 XMOT.16
N$2
  Bottom 0.813: U$21.16 129.54,21.59 JP25.1
N$3
  Bottom 0.813: XMOT.13 132.08,43.18 JP7.2
N$4
  Bottom 0.813: JP7.3 XMOT.12
N$5
  Bottom 0.813: XMOT.9 137.16,43.18 JP7.4
N$6
  Bottom 0.813: U$46.22 166.37,17.15 JP5.7
N$7
  Bottom 0.508: JP1.7 XMOT.22
N$8
  Bottom 0.508: XMOT.25 116.84,43.18 JP1.3
N$9
  Bottom 0.508: JP1.1 114.3,40.64 119.38,40.64 XMOT.24
N$10
  Top 1.016: JP10.3 195.58,48.26 195.58,40.04 191.77,40.04 U$43.2
N$11
  Bottom 0.508: XMOT.1 149.86,43.18 JP3.1
N$12
  Bottom 0.813: JP5.5 U$46.23
N$13
  Bottom 0.813: U$21.13 132.08,15.24 132.08,21.59 JP25.2
N$14
  Bottom 0.813: U$21.12 134.62,21.59 JP25.3
N$15
  Top 0.813: R14.1 R13.1
  Bottom 0.508: XMOT.11 135.89,34.29 133.35,31.75 R14.1
N$16
  Bottom 0.508: 132.08,33.02 XMOT.14 | R15.1 R16.1
  Bottom 0.813: 132.08,33.02 119.38,33.02 R15.1
N$17
  Bottom 0.813: U$21.9 138.43,17.78 137.16,19.05 137.16,21.59 JP25.4
N$18
  Bottom 0.508: JP9.7 U$43.22
N$19
  Bottom 0.508: C8.2 XMOT.7
N$20
  Bottom 0.813: JP4.7 U$21.22
N$21
  Bottom 0.813: U$21.25 116.84,15.24 JP4.3
N$22
  Bottom 0.813: JP4.1 114.3,12.7 119.38,12.7 U$21.24
N$23
  Bottom 0.813: U$43.23 163.83,43.18 JP9.5
N$24
  Bottom 0.813: JP8.3 196.58,20.32 195.78,13.1 191.97,11 U$46.2
N$25
  Bottom 0.813: JP5.3 U$46.25
N$26
  Bottom 0.508: 135.89,6.35 U$21.11 | R17.1 R18.1
  Bottom 0.813: R17.1 135.89,6.35
N$27
  Bottom 0.889: U$21.14 132.08,11.43 128.27,7.62 R19.1 R20.1
N$28
  Bottom 1.016: U$21.7 140.94,15.94 C16.2
N$29
  Bottom 0.813: JP26.1 U$43.16
N$30
  Bottom 0.813: U$43.13 176.53,43.18 JP26.2
N$31
  Bottom 0.813: JP26.3 U$43.12
N$32
  Bottom 0.813: U$43.9 181.61,43.18 JP26.4
N$33
  Bottom 0.813: JP5.1 160.02,12.7 163.83,12.7 U$46.24
N$34
  Bottom 0.508: U$21.2 147.32,21.59 JP6.3
N$35
  Bottom 0.813: U$46.1 194.31,15.24 JP8.1
N$36
  Bottom 0.508: XMOT.2 147.32,44.45 148.59,45.72 148.59,48.26 JP3.3
N$37
  Bottom 0.813: U$21.23 119.38,15.24 JP4.5
N$38
  Bottom 0.508: XMOT.23 119.38,43.18 JP1.5
N$39
  Bottom 0.813: U$43.25 161.29,43.18 JP9.3
N$40
  Bottom 0.406: U$43.11 180.3,41.91
  Bottom 0.813: 180.3,41.91 180.3,34.6 173.99,34.7 R21.1
  Bottom 0.889: R22.1 R21.1
N$41
  Bottom 0.889: U$43.14 176.53,39.37 171.55,34.49 R23.1 R24.1
N$42
  Bottom 0.813: C19.2 U$43.7
N$43
  Top 0.813: U$46.16 173.99,21.59 JP31.1
N$44
  Bottom 0.813: U$46.13 177.3,17.59 JP31.2
N$45
  Bottom 0.813: U$46.12 179.07,21.59 JP31.3
N$46
  Bottom 0.813: U$46.9 182.88,21.59 JP31.4
N$48
  Bottom 0.813: LED2.A 31.75,27.94 R1.1
N$50
  Bottom 0.813: SV1.5 IC2.16
N$51
  Bottom 0.813: SV1.4 IC2.17
N$52
  Bottom 0.813: SV1.3 IC2.18
N$53
  Bottom 0.813: SV1.2 IC2.19
N$54
  Bottom 0.508: 180.34,8.89 U$46.11
  Bottom 0.813: R26.1 176.53,5.08 | 176.53,5.08 180.34,8.89 | 176.53,5.08 R25.1
N$55
  Bottom 0.889: U$46.14 176.53,11.43 172.72,7.62 R27.1 R28.1
N$56
  Bottom 0.508: C22.2 U$46.7
N$57
  Top 0.635: 15.24,22.86 LED3.K
  Bottom 0.635: 15.24,22.86 LED3.K
  Bottom 1.93: X1.2 15.24,22.86 Q4.D
N$58
  Bottom 0.813: SV1.1 IC2.20
N$59
  Bottom 0.635: 20.32,8.89 Q3.D | 15.24,6.35 LED5.K
  Bottom 1.93: 20.32,8.89 17.78,8.89 15.24,6.35 10.16,6.35 7.62,8.89 X2.2
N$60
  Top 0.813: Q4.G R2.2
N$61
  Top 0.635: 20.32,11.43 Q3.G
  Top 0.813: 20.32,11.43 24.13,11.43 R3.2
N$62  (via drill 0.6 pad 1.78)
  Top 0.889: v110.89,34.29 110.49,44.45 107.95,46.99 SV2.5
  Bottom 0.889: v110.89,34.29 IC2.21
N$63
  Top 0.508: IC2.22 102.87,35.56 102.87,41.91 SV2.4
N$64
  Top 0.635: 15.24,20.32 LED3.A | 15.24,25.4 R7.1
  Top 0.813: 15.24,20.32 13.97,21.59 13.97,24.13 15.24,25.4
N$65
  Top 0.635: 15.24,8.89 LED5.A | 15.24,12.7 R29.1
  Top 1.27: R29.1 LED5.A
N$66
  Top 0.635: 46.99,27.94 R6.1
  Top 1.016: 46.99,27.94 45.72,29.21 Q1.D
N$67
  Top 0.813: R30.2 43.18,29.21 Q1.G
N$68
  Top 1.27: C5.1 IC1.IN
  Bottom 0.889: IC1.IN 39.37,43.18 38.1,41.91 D3.C
N$69  (via drill 0.61 pad 1.42)
  Top 0.813: v101.6,39.37 IC2.23
  Bottom 0.508: v101.6,39.37 104.14,41.91 SV2.3
N$70
  Bottom 0.813: SERIAL.6 80.74,1.27 64.77,1.27 C1.1
N$71
  Top 0.813: SERIAL.3 73.62,6.35 JP38.2
N$72
  Bottom 1.93: 14.04,52 F2.1
  Bottom 2.184: K2.14 29.44,40.56 18,52 14.04,52
N$73  (via drill 0.61 pad 1.78)
  Top 0.889: 44.45,27.94 R6.2
  Top 1.016: 44.45,27.94 46.99,25.4 v47.99,22.36
  Bottom 0.889: v47.99,22.36 46.99,17.78 8.89,17.78 3.58,21.59 3.58,34.29 16.51,34.29 K2.A1
N$74
  Top 0.508: 38.1,6.35 X5.2
  Top 2.54: 38.1,6.35 43.18,11.43 F1.2
N$75
  Bottom 0.381: C12.2 90.93,14.48 | 107.7,13.21 IC3.17
  Bottom 0.61: 90.93,14.48 107.7,14.48
  Bottom 0.813: 107.7,14.48 107.7,13.21
N$76
  Bottom 0.813: JP6.1 U$21.1
N$77  (via drill 0.61)
  Top 0.381: v99.31,7.86 99.31,5.08 X4.1
  Bottom 0.381: 111.51,3.56 111.51,3.3 IC3.1
  Bottom 0.813: v99.31,7.86 101.59,6.78 109.48,6.78 111.51,3.56
N$78  (via drill 0.61)
  Top 0.381: 100.08,7.1 100.08,5.08 X4.2
  Top 0.813: v108.91,16.33 100.08,7.1
  Bottom 0.381: 108.91,13.21 108.97,13.21 IC3.18
  Bottom 0.813: 108.91,13.21 v108.91,16.33
N$79  (via drill 0.61)
  Top 0.381: 100.81,6.24 100.71,5.08 X4.3
  Top 0.813: 100.81,6.24 110.08,11.22 109.98,13.72 v110.38,16.3
  Bottom 0.381: v110.38,16.3 109.98,13.21 110.24,13.21 IC3.19
N$80
  Top 0.508: 90.17,26.67 Q5.2
  Top 0.813: IC2.12 87.63,20.32 87.63,24.13 90.17,26.67 90.17,30.48 C26.2
N$81
  Top 0.508: 95.25,26.67 Q5.1
  Top 0.813: IC2.13 90.17,20.32 90.17,21.59 95.25,26.67
  Bottom 0.508: C24.2 100.33,26.67 Q5.1
N$82
  Bottom 0.381: 110.29,2.75 IC3.2 | 87.88,8.89 87.76,9.02
  Bottom 0.508: 87.63,8.89 87.76,9.02 | 89,9.66 Q2.2
  Bottom 0.61: 110.29,2.75 110.29,1.48 112.01,1.38 113.27,1.43 113.27,8.89 87.88,8.89
  Bottom 0.813: 87.76,9.02 89,9.66 | C27.1 87.63,8.89
N$83
  Bottom 0.381: 108.97,3.3 IC3.3 | 88.49,5.12 88.27,4.45
  Bottom 0.61: C25.1 87.63,3.81 88.27,4.45 88.9,5.08 Q2.1
  Bottom 0.813: 108.97,3.3 108.97,5.02 88.49,5.12
PB5-MOSI
  Top 0.813: IC2.6 74.53,15.24 74.53,11.43 JP2.4
PB6-MISO
  Top 0.508: IC2.7 74.93,20.32 74.93,21.59 76.2,22.86 82.55,22.86 82.55,12.7 80.01,10.16 80.01,8.89 JP2.1
PB7-SCK
  Top 0.508: IC2.8 77.47,20.32 77.47,21.59 80.01,21.59 80.01,11.43 JP2.3
RELAY
  Top 0.813: R30.1 49.53,17.78 58.42,17.78 IC2.1
RELAY_POWER
  Bottom 0.508: 7.62,39.37 X3.2
  Bottom 1.016: D3.A 36.56,31.44 35.5,32.5 23.38,32.5 K2.11
  Bottom 2.184: K2.11 15.24,44.64 K2.A2
  Bottom 2.54: 7.62,39.37 8.89,40.64 K2.11
RXD  (via drill 0.61)
  Top 0.381: v82.7,2.34 82.55,2.79 82.55,5.08 81.79,5.84 77.47,5.84
  Top 0.508: v77.47,13.97 77.47,5.84 77.47,5.08 SERIAL.4
  Bottom 0.381: 100.08,3.05 IC3.10
  Bottom 0.508: IC2.14 90.17,17.78 81.28,17.78 v77.47,13.97
  Bottom 0.813: 100.08,3.05 99.47,2.34 v82.7,2.34
TXD
  Top 0.813: IC2.15 92.71,17.78 92.71,11.43 86.36,5.08 86.36,3.81 83.82,1.27 78.74,1.27 SERIAL.5
  Bottom 0.381: IC2.15 91.95,17.02 88.9,17.02 88.9,14.73 91.69,11.94 101.35,11.94 101.35,12.95 IC3.12
VMOT  (via drill 0.6, 1.1)
  Top 0.508: 127,11.43 U$21.18 | 184.15,11.43 U$46.8 | 36.83,47.49 36.58,47.48
  Top 0.813: 144.78,8.89 C15.2 | 144.78,36.5 C7.2
  Top 0.889: 139.7,8.89 U$21.8
  Top 1.016: R1.2 35.56,31.75 35.56,45.72 36.58,47.48
  Top 1.93: C2.1 36.58,47.48 | 127,11.43 127,8.89 139.7,8.89 144.78,8.89 C17.1 171.45,8.89 | 171.45,8.89 v171.45,11.43 | 184.09,8.82 181.61,8.89 171.45,8.89 | 184.09,8.82 184.15,11.43 | 190.5,8.89 184.15,8.89 184.09,8.82 | 190.5,8.89 194.78,8.99 197.82,12.33 C23.1 199.39,34 | C21.2 190.5,8.89 | XMOT.8 140,40.01 140,36.5 | 140,36.5 127,36.5 | 127,36.5 XMOT.18 | v113.09,36.41 126.5,36.51 127,36.5 | U$43.8 184.15,37.65 | 184.15,37.65 183,36.5 171.5,36.5 | 171.5,36.5 171.5,39.95 U$43.18 | 140,36.5 144.78,36.5 147.17,35 C11.1 153.57,36.5 171.5,36.5 | 184.15,37.65 184.17,37.05 C18.2 198.8,33.99 199.39,34 | C20.1 199.39,34 | F2.2 36.83,52.07 36.83,47.49
  Bottom 0.508: v171.45,11.43 U$46.18
  Bottom 1.93: v113.09,36.41 110.2,42 109.5,50 107.5,52 24.2,52 F2.2
X-DIR
  Top 0.61: 123.29,51 120.75,52.27 72.39,52.07
  Top 0.813: 123.29,51 XMOT.21 | 72.39,52.07 72.39,38.1 IC2.36
X-STEP
  Top 0.813: IC2.37 64.77,35.56 64.77,53.34 148.59,53.34 151.63,50.8 151.63,44.7 146.35,44.7 XMOT.3
X-STOP  (via drill 0.61 pad 1.78)
  Top 0.813: v85.19,22.96 87.63,27.4 JP27.1
  Bottom 0.508: IC2.3 63.5,22.86 v85.19,22.96
Y-DIR  (via drill 0.61 pad 1.42)
  Top 0.61: 107.95,20.32 124.19,20.32
  Top 0.813: 124.19,20.32 U$21.21 | v107.95,40.64 107.95,20.32
  Bottom 0.508: v107.95,40.64 107.95,43.18 99.06,43.18 92.71,36.83 88.9,36.83 87.63,35.56 | IC2.29 87.63,35.56 | IC2.33 77.47,35.56 87.63,35.56
Y-STEP  (via drill 0.61 pad 1.78)
  Top 0.61: v147.32,27.17 147.32,15.24
  Top 0.813: 147.32,15.24 U$21.3
  Bottom 0.508: v147.32,27.17 146.05,27.94 85.09,27.94 81.28,31.75 74.93,31.75 73.66,33.02 IC2.34
Y-STOP
  Bottom 0.813: IC2.38 66.04,36.83 87.13,36.83 93.98,43.18 JP28.1
Z-DIR  (via drill 0.61 pad 1.78)
  Top 0.813: v111.76,48.43 99.06,48.43 99.06,41.91 IC2.27
  Bottom 0.508: U$43.21 167.64,52.07 114.3,52.07 113.23,50.8 113.03,49.53 v111.76,48.43
Z-STEP  (via drill 0.61 pad 1.78)
  Top 0.813: v111.66,50.5 90.17,50.8 90.17,35.56 IC2.28
  Bottom 0.813: U$43.3 188.5,53.34 111.8,53.34 v111.66,50.5
Z-STOP
  Top 0.813: IC2.2 62.23,20.32 62.23,21.59 67.31,26.67 74.93,26.67 74.93,39.37 JP29.1

## Text on the board
_tsilk: Sanguish long 0.1